# EAGLE board OoffAttSMDnormed (EAGLE 9.3.0)

Size 18 x 100 mm. Coordinates in mm from the lower left corner, seen from the top.
Outline: 0,0 18,0 18,100 0,100 0,0
Copper layers (1*16): Top 0.035mm / dielectric 1.5mm / Bottom 0.035mm
Design rules "default": minimum track width 6mil, minimum drill 0.35mm, track to track 6mil, track to pad 6mil, pad to pad 6mil, via to via 6mil, smd to smd 6mil, copper to edge 40mil, drill to drill 6mil, minimum pad ring 10mil, minimum via ring 8mil, stop-mask expansion 4mil, vias tented up to drill 0mil, thermal gap 10mil

## Footprints (pad centres in the part's own frame; a part is rotated, then mirrored left to right if it is on the bottom)
POT-PTH-ALPS = drill 1 pad 1.88 square: P$1 7,-2.5; P$2 7,0; P$3 7,2.5 | drill 2 octagon: P$4 0,-4.4; P$5 0,4.4
C0603 = smd 1.1 x 1: 1 -0.85,0; 2 0.85,0
CPOL-RADIAL-2.5MM-5MM = drill 0.7 pad 1.651 square: 1 1.25,0 | drill 0.7 pad 1.651: 2 -1.25,0
DO35-7 = drill 0.813 long: A 3.81,0; C -3.81,0
SO08 = smd 0.6 x 2.2: 1 -1.905,-2.6; 2 -0.635,-2.6; 3 0.635,-2.6; 4 1.905,-2.6; 5 1.905,2.6; 6 0.635,2.6; 7 -0.635,2.6; 8 -1.905,2.6
WQP-PJ301M-12_JACK = drill 1.1: P$1 0,5; P$2 0,-3.5; P$3 0,-6.5
LED3MM = drill 0.813 octagon: A -1.27,0; K 1.27,0
ML10 = drill 0.914 octagon: 1 -5.08,-1.27; 2 -5.08,1.27; 3 -2.54,-1.27; 4 -2.54,1.27; 5 0,-1.27; 6 0,1.27; 7 2.54,-1.27; 8 2.54,1.27; 9 5.08,-1.27; 10 5.08,1.27
0207/2V = drill 0.813 octagon: 1 -1.27,0; 2 1.27,0
R0603 = smd 1 x 1.1: 1 -0.85,0; 2 0.85,0

## Placement (x,y rotation side)
ATT1  10k  [POT-PTH-ALPS]  6.99,79.63 270 top
ATT2  10k  [POT-PTH-ALPS]  6.99,20.45 90 top
C1  100n  [C0603]  14.99,79.25 0 bottom
C2  100n  [C0603]  14.86,66.67 0 bottom
C3  10uF  [CPOL-RADIAL-2.5MM-5MM]  15.24,40.26 90 top
C4  10uF  [CPOL-RADIAL-2.5MM-5MM]  15.24,31.5 90 top
D1  [DO35-7]  6.22,53.72 180 top
D2  [DO35-7]  6.22,56.01 180 top
IC1  TL072D  [SO08]  14.61,73.15 0 bottom
IC2  TL072D  [SO08]  14.73,58.8 0 bottom
IC3  TL072D  [SO08]  6.99,36.32 0 bottom
IN_1  WQP-PJ301M-12_JACK  [WQP-PJ301M-12_JACK]  4.45,93.09 0 top
IN_2  WQP-PJ301M-12_JACK  [WQP-PJ301M-12_JACK]  4.45,6.99 180 top
LED_1  [LED3MM]  14.86,83.06 0 top
LED_2  [LED3MM]  14.99,16.64 0 top
OFFS1  10k  [POT-PTH-ALPS]  6.99,65.28 270 top
OFFS2  10k  [POT-PTH-ALPS]  6.99,34.92 90 top
OUT1  WQP-PJ301M-12_JACK  [WQP-PJ301M-12_JACK]  13.59,93.09 0 top
OUT2  WQP-PJ301M-12_JACK  [WQP-PJ301M-12_JACK]  13.59,6.99 180 top
POWER  [ML10]  9.02,47.5 0 bottom
R1  43k  [0207/2V]  13.59,25.4 270 top
R2  10k  [R0603]  2.41,76.07 0 bottom
R3  10k  [R0603]  5.97,76.07 0 bottom
R4  100k  [R0603]  3.56,69.98 0 bottom
R5  100k  [R0603]  7.24,69.85 0 bottom
R6  10k  [R0603]  9.53,76.07 0 bottom
R7  100k  [R0603]  10.92,69.22 90 bottom
R8  1k  [R0603]  6.22,79.12 0 bottom
R9  3k  [R0603]  8.13,83.31 0 bottom
R10  10k  [R0603]  8,17.91 0 bottom
R11  100k  [R0603]  6.99,14.48 90 bottom
R12  100k  [R0603]  9.65,31.24 180 bottom
R13  10k  [R0603]  8.13,21.59 270 bottom
R14  100k  [R0603]  4.19,31.11 0 bottom
R15  43k  [0207/2V]  16.26,25.78 90 top
R16  10k  [R0603]  5.46,21.46 270 bottom
R17  1k  [R0603]  16.26,12.32 270 bottom
R18  3k  [R0603]  10.29,14.48 180 bottom

## Library data of the parts
ATT1 ATT2 OFFS1 OFFS2 = SparkFun-Resistors; PROD_ID: RES-09177; SF_SKU: COM-09288
C1 C2 R1 R15 = resistor
C3 C4 = SparkFun-Capacitors; PROD_ID: CAP-08440
D1 D2 = diode
IC1-IC3 = linear
IN_1 IN_2 OUT1 OUT2 = thonkiconn
LED_1 LED_2 = led
POWER = con-ml; OC_FARNELL: unknown; OC_NEWARK: unknown
R2-R14 R16-R18 = adafruit

## Nets
+12V: C1.2 C3.1 D1.C IC1.8 IC2.8 IC3.8 OFFS1.P$1 OFFS2.P$1
-12V: C2.1 C4.2 D2.A IC1.4 IC2.4 IC3.4 OFFS1.P$3 OFFS2.P$3
GND: ATT1.P$2 ATT2.P$2 C1.1 C2.2 C3.2 C4.1 IC1.5 IC2.3 IC2.5 IC3.5 IN_1.P$3 IN_2.P$3 OUT1.P$3 OUT2.P$3 POWER.3 POWER.4 POWER.5 POWER.6 POWER.7 POWER.8
N$1: D1.A POWER.9 POWER.10
N$2: D2.C POWER.1 POWER.2
N$3: IC2.1 LED_1.K
N$4: IC3.2 R12.2 R14.1 R15.2
N$5: ATT2.P$1 IC3.3 R11.2
N$6: IC3.1 R14.2 R16.1
N$7: IN_2.P$1 R11.1 R12.1
N$8: IC3.6 R10.1 R13.2 R16.2
N$9: IC3.7 R10.2 R17.1 R18.2
N$10: OFFS2.P$2 R13.1
N$11: ATT2.P$3 R15.1
N$12: OUT2.P$1 R17.2
N$13: IC1.2 R1.2 R5.1 R7.2
N$14: OUT1.P$1 R8.2
N$16: ATT1.P$1 IC1.3 R4.2
N$17: IC2.7 LED_2.K
N$18: IC2.6 LED_2.A R18.1
N$36: IC2.2 LED_1.A R9.1
N$61: ATT1.P$3 R1.1
N$62: IC1.1 R3.1 R5.2
N$63: IN_1.P$1 R4.1 R7.1
N$64: IC1.6 R2.1 R3.2 R6.2
N$65: IC1.7 R2.2 R8.1 R9.2
N$68: OFFS1.P$2 R6.1

## Tracks (layer width: path | path; a pad name or v marks a point on that pad's centre or on a via)
+12V  (7 unrouted)
-12V  (7 unrouted)
GND  (19 unrouted)
N$1  (2 unrouted)
N$2  (2 unrouted)
N$3  (1 unrouted)
N$4  (3 unrouted)
N$5  (2 unrouted)
N$6  (2 unrouted)
N$7  (2 unrouted)
N$8  (3 unrouted)
N$9  (3 unrouted)
N$10  (1 unrouted)
N$11  (1 unrouted)
N$12  (1 unrouted)
N$13  (3 unrouted)
N$14  (1 unrouted)
N$16  (2 unrouted)
N$17  (1 unrouted)
N$18  (2 unrouted)
N$36  (2 unrouted)
N$61  (1 unrouted)
N$62  (2 unrouted)
N$63  (2 unrouted)
N$64  (3 unrouted)
N$65  (3 unrouted)
N$68  (1 unrouted)